# Altium PCB PCB_remote.PcbDoc
Units mm, origin at the board's own origin, x right, y up, seen from the top; angles counter-clockwise.
Board outline 91.74 x 75.36 mm, 2 copper layers (Top Layer, Bottom Layer); 11 components, 18 nets, 119 pads, 0 vias.
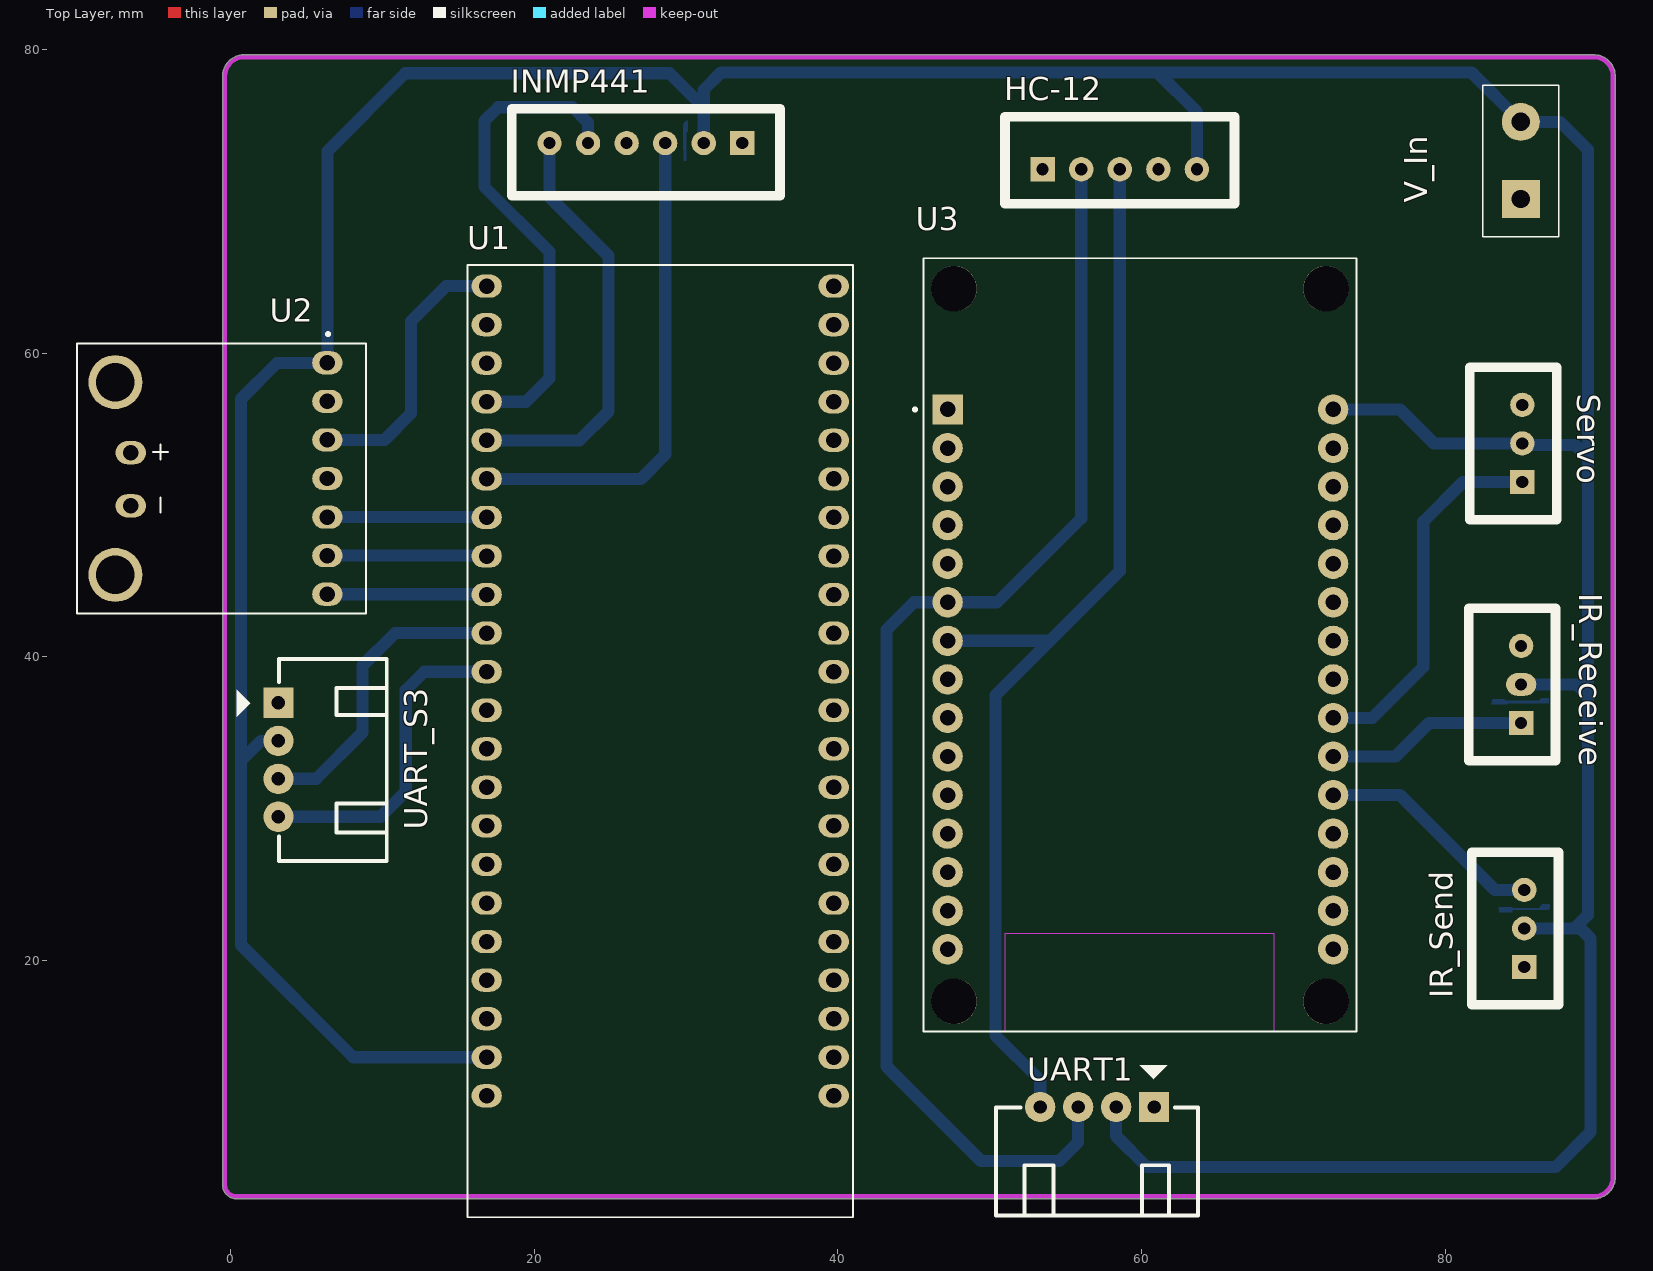
[diagram p0: Top Layer view]
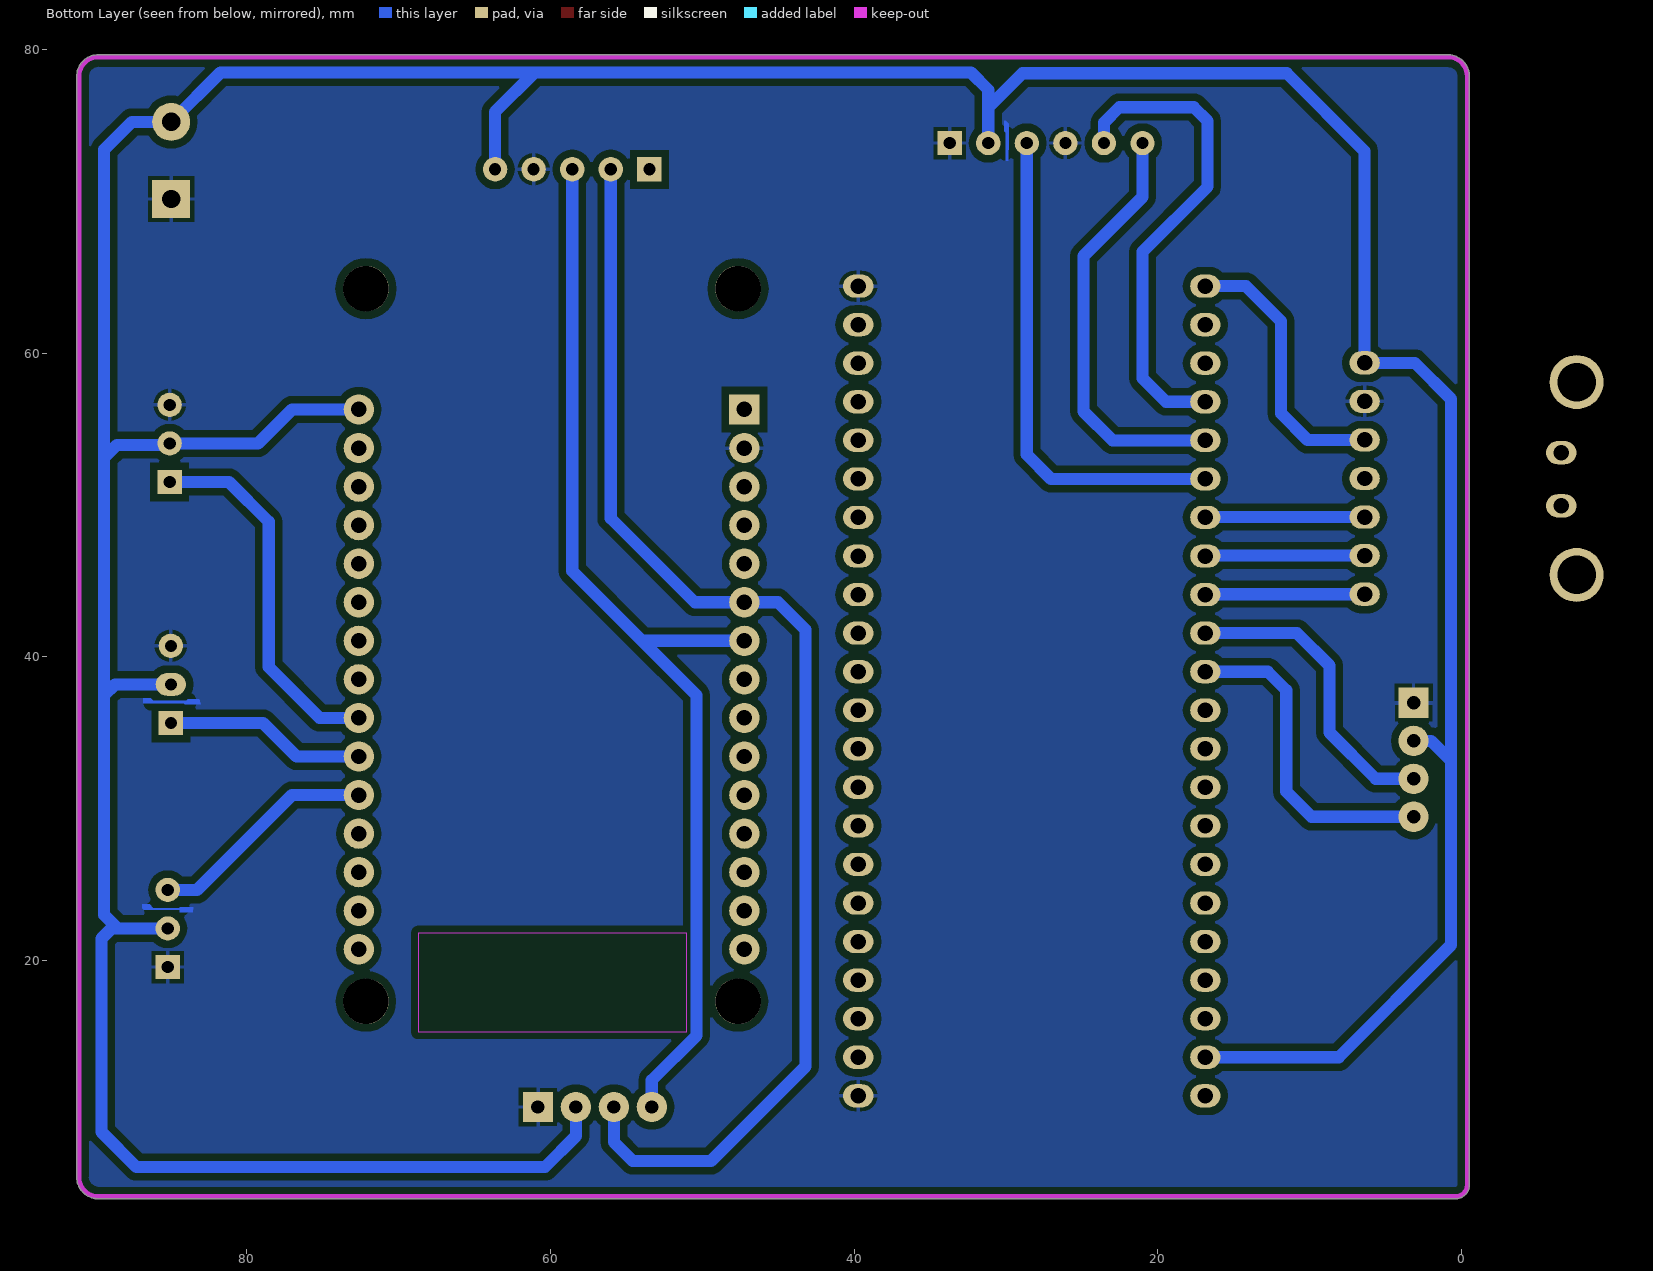
[diagram p1: Bottom Layer view, seen from below]
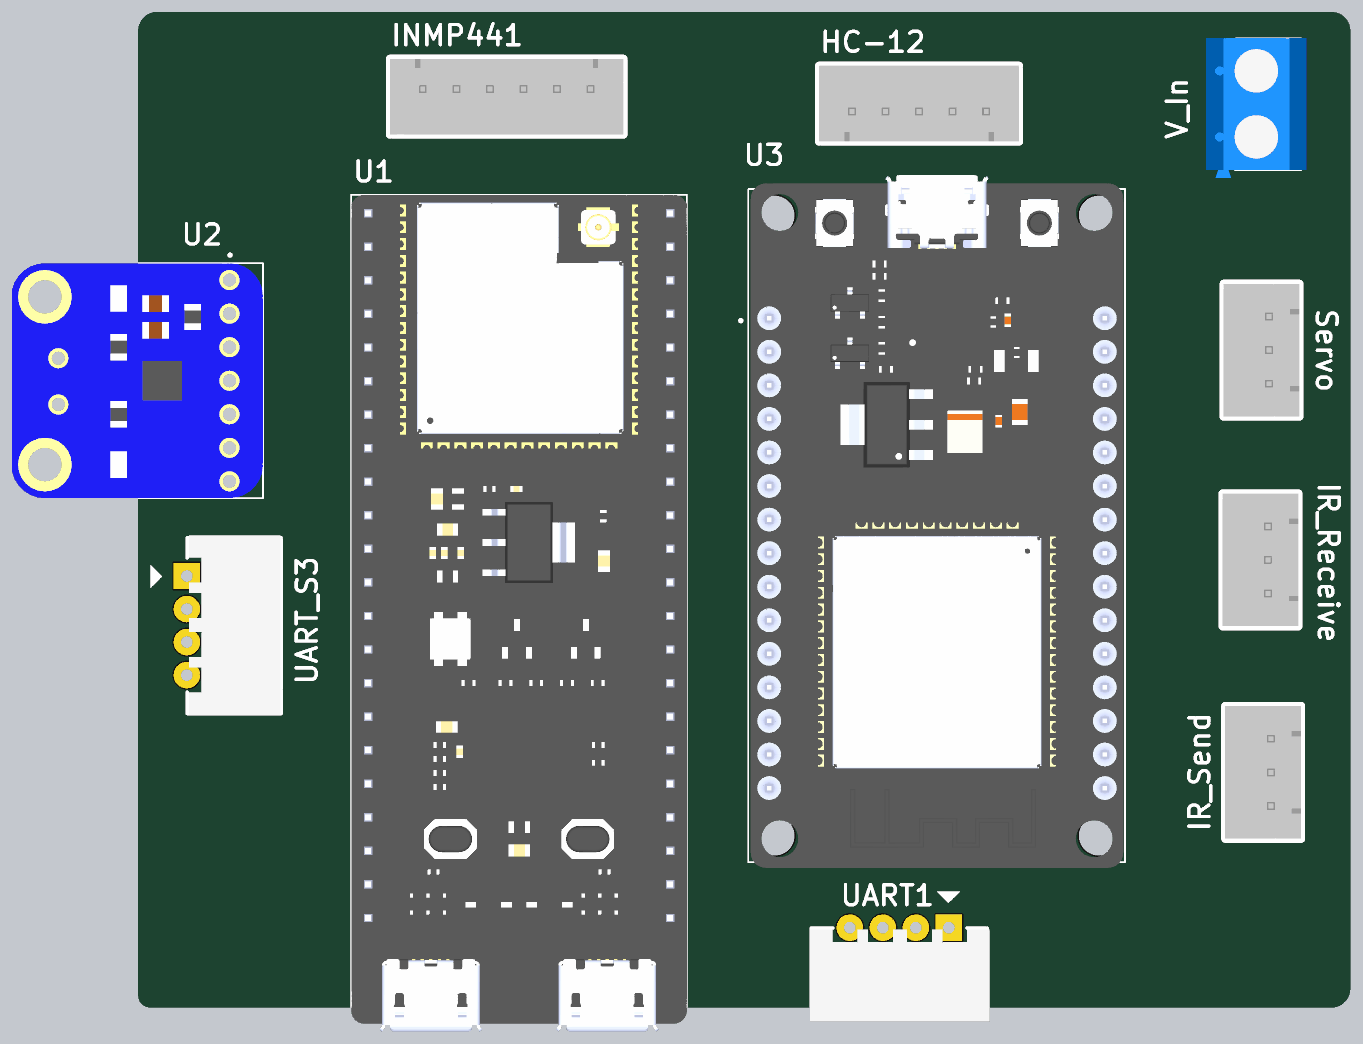
[diagram p2: 3D render of the assembled board from above, using the file's embedded part models]

## Layer stack, top to bottom
Top Solder: solder mask 0.0102, Solder Resist, Dk 3.5
Top Layer: signal copper 0.0356
Dielectric 1: dielectric 0.32, FR-4, Dk 4.8
Bottom Layer: signal copper 0.0356
Bottom Solder: solder mask 0.0102, Solder Resist, Dk 3.5

## Board outline
-0.531,5.207 ccw(c0.381,5.207) 0.381,4.295 89.941,4.295 ccw(c89.941,4.445) 90.012,4.312 ccw(c89.789,5.715) 91.209,5.715 91.209,78.308 ccw(c91.059,78.308) 91.205,78.345 ccw(c89.789,78.232) 89.789,79.652 0.762,79.652 ccw(c0.762,79.502) 0.702,79.64 ccw(c0.889,78.232) -0.531,78.232

## Design rules (kind name [scope] priority, off if disabled: settings)
Clearance [All] p1: gap=0.5 ignorepadtopadclearanceinfootprint=FALSE
PolygonConnect [All] p1: connectstyle=Relief reliefconductorwidth=0.254 reliefentries=4 polygonreliefangle="90 Angle" airgapwidth=0.254
RoomDefinition Sch_remote [InComponentClass('Sch_remote')] p1: confinementstyle=ConfineIn formatcopy=TRUE lockcomponents=FALSE outline -78.105,-45.593 -27.305,-45.593 -27.305,-20.193 -78.105,-20.193
RoutingVias [All] p1: holewidth=0.711 width=1.27 viastyle="Through Hole" minholewidth=0.711 minwidth=1.27 maxholewidth=0.711 maxwidth=1.27
SolderMaskExpansion [All] p1: expansion=0.102
Width [All] p1: maxlimit=0.254 minlimit=0.254 preferedwidth=0.254
30 further rules are at their usual default settings.

## Components (designator, comment, footprint, x,y, rotation, side; value= is the part's Value field where it differs from the comment)
HC-12 "HC-12" XH2.54M-5 53.492,72.111 r0 top
INMP441 "INMP441" XH2.54M-6 33.706,73.838 r180 top
IR_Receive "IR_Receive" XH2.54M-3#1 85.014,35.636 r90 top
IR_Send "IR_Send" XH2.54M-3#2 85.217,19.558 r90 top
Servo "Servo" XH2.54M-3#2 85.09,51.511 r90 top
U1 "ESP32-S3-DEVKITC" ESP32_S3_DEV_KIT 28.296,34.444 r0 top
U2 "MAX98357A" MAX98357 -0.61,51.74 r90 top
U3 "ESP32_30Pin_DevKit" MODULE_ESP32_DEVKIT_V1 59.93,40.772 r0 top
UART1 "UART1" "Header 4P DC 2.54" 60.804,10.312 r270 top
UART_S3 "UART_S3" "Header 4P DC 2.54" 3.175,36.932 r0 top
V_In "V_In" header_2_power 84.988,70.155 r90 top

## Footprints (in the part's own frame and the unit in brackets; to place one, negate y for a bottom-side part, rotate by r counter-clockwise, add the part's x,y. Pads: shape width x height; smd on the part's side, far side on the other; paste and mask are expansions set on the pad)
ESP32_S3_DEV_KIT [mm]
  oval 2x1.53 hole 1.02 mask+0.102: J1_1(-11.43,29.97) J1_2(-11.43,27.43) J1_3(-11.43,24.89) J1_4(-11.43,22.35) J1_5(-11.43,19.81) J1_6(-11.43,17.27) J1_7(-11.43,14.73) J1_8(-11.43,12.19) J1_9(-11.43,9.65) J1_10(-11.43,7.11) J1_11(-11.43,4.57) J1_12(-11.43,2.03) J1_13(-11.43,-0.51) J1_14(-11.43,-3.05) J1_15(-11.43,-5.59) J1_16(-11.43,-8.13) J1_17(-11.43,-10.67) J1_18(-11.43,-13.21) J1_19(-11.43,-15.75) J1_20(-11.43,-18.29) J1_21(-11.43,-20.83) J1_22(-11.43,-23.37) J3_1(11.43,29.97) J3_2(11.43,27.43) J3_3(11.43,24.89) J3_4(11.43,22.35) J3_5(11.43,19.81) J3_6(11.43,17.27) J3_7(11.43,14.73) J3_8(11.43,12.19) J3_9(11.43,9.65) J3_10(11.43,7.11) J3_11(11.43,4.57) J3_12(11.43,2.03) J3_13(11.43,-0.51) J3_14(11.43,-3.05) J3_15(11.43,-5.59) J3_16(11.43,-8.13) J3_17(11.43,-10.67) J3_18(11.43,-13.21) J3_19(11.43,-15.75) J3_20(11.43,-18.29) J3_21(11.43,-20.83) J3_22(11.43,-23.37)
  silkscreen extent -12.7,-31.37 12.7,31.37, body extent -12.7,-31.96 12.7,31.37, height 7.49
"Header 4P DC 2.54" [mil]
  rect 78.74x78.74 hole 35: 1(-1,1)
  round 78.74 hole 35: 2(-1,-97.43) 3(-1,-195.85) 4(-1,-294.28)
  silkscreen extent -110,-409 280,115, body extent 5,-413 278,123, height 290
header_2_power [mm]
  rect 2.5x2.5 hole 1.2 unplated mask+0.102: 1(0,0)
  round 2.5 hole 1.2 unplated mask+0.102: 2(5.08,0)
  silkscreen extent -2.5,-2.5 7.5,2.5, body extent -3.06,-2.91 7.54,4.69, height 10
MAX98357 [mm]
  oval 1.53x2 hole 1.02: 1(7.62,-6.985) 2(5.08,-6.985) 3(2.54,-6.985) 4(0,-6.985) 5(-2.54,-6.985) 6(-5.08,-6.985) 7(-7.62,-6.985) X1_1(-1.8,5.969) X1_2(1.7,5.969)
  round 3.556 hole 2.54: MH1(-6.35,6.985) MH2(6.35,6.985)
  silkscreen extent -8.89,-9.53 9.61,9.53, body extent -8.89,-9.53 8.89,9.53, height 3
MODULE_ESP32_DEVKIT_V1 [mm]
  rect 2x2 / inner round 2 / far side rect 2x2 hole 1.02: 1(-12.7,15.515)
  round 2 hole 1.02: 2(-12.7,12.975) 3(-12.7,10.435) 4(-12.7,7.895) 5(-12.7,5.355) 6(-12.7,2.815) 7(-12.7,0.275) 8(-12.7,-2.265) 9(-12.7,-4.805) 10(-12.7,-7.345) 11(-12.7,-9.885) 12(-12.7,-12.425) 13(-12.7,-14.965) 14(-12.7,-17.505) 15(-12.7,-20.045) 16(12.7,-20.045) 17(12.7,-17.505) 18(12.7,-14.965) 19(12.7,-12.425) 20(12.7,-9.885) 21(12.7,-7.345) 22(12.7,-4.805) 23(12.7,-2.265) 24(12.7,0.275) 25(12.7,2.815) 26(12.7,5.355) 27(12.7,7.895) 28(12.7,10.435) 29(12.7,12.975) 30(12.7,15.515)
  round 3 hole 3 unplated: ""(-12.28,-23.475) ""(-12.28,23.475) ""(12.23,-23.475) ""(12.23,23.475)
  Keep-Out Layer region: 8.78,-25.475 -8.91,-25.475 -8.91,-18.985 8.78,-18.985
  Keep-Out Layer region: 8.78,-25.475 -8.91,-25.475 -8.91,-18.985 8.78,-18.985
  silkscreen extent -14.95,-25.48 14.23,25.48, body extent -14.1,-25.9 14.1,26.55, height 7.05
XH2.54M-3#1 [mm]
  rect 1.6x1.6 hole 0.8: 1(0,0)
  oval 1.5x2 hole 0.8: 2(2.54,0)
  round 1.6 hole 0.8: 3(5.08,0)
  silkscreen extent -2.48,-2.26 7.56,3.46, body extent -2.48,-2.26 7.56,3.48, height 6.91
XH2.54M-3#2 [mm]
  rect 1.6x1.6 hole 0.8: 1(0,0)
  round 1.6 hole 0.8: 2(2.54,0) 3(5.08,0)
  silkscreen extent -2.48,-2.26 7.56,3.46, body extent -2.48,-2.26 7.56,3.48, height 6.91
XH2.54M-5 [mm]
  rect 1.6x1.6 hole 0.8: 1(0,0)
  round 1.6 hole 0.8: 2(2.54,0) 3(5.08,0) 4(7.62,0) 5(10.16,0)
  silkscreen extent -2.48,-2.26 12.64,3.46, body extent -2.48,-2.26 12.64,3.48, height 6.91
XH2.54M-6 [mm]
  rect 1.6x1.6 hole 0.8: 1(0,0)
  round 1.6 hole 0.8: 2(2.54,0) 3(5.08,0) 4(7.62,0) 5(10.16,0) 6(12.7,0)
  silkscreen extent -2.48,-2.26 15.18,3.46, body extent -2.48,-2.26 15.18,3.48, height 6.91

## Part data
HC-12: library part "Header 5P 2.54 Duc Thang", "C?m", Chung_Loai=C?m, Don_Vi=Con, Ma_Hang=MH001298, Ten_Linh_Kien="Header 5P XH2.54-5P Ð?c Th?ng"
INMP441: library part "Header 6P 2.54 Duc Thang", "C?m", Chung_Loai=C?m, Don_Vi=Con, Ma_Hang=MH001972, Ten_Linh_Kien="Header 6P XH2.54-6P Ð?c Th?ng"
IR_Receive IR_Send Servo: library part "Header 3P 2.54 Duc Thang", "C?m", Chung_Loai=C?m, Don_Vi=Con, Ma_Hang=MH001292, Ten_Linh_Kien="Header 3P XH2.54-3P Ð?c Th?ng"
U1: "The ESP32-S3-DEVKITC-1U-N8R8 from Espressif Systems is an evaluation board designed for wireless communication applications. It features a 32-bit Xtensa dual-core processor running at 240MHz, providing strong processing power for complex tasks. The board", Package=None, Check_prices=https://www.snapeda.com/parts/ESP32-S3-DEVKITC-1U-N8R8/Espressif+Systems/view-part/?ref=eda, MF="Espressif Systems", MP=ESP32-S3-DEVKITC-1U-N8R8, SnapEDA_Link=https://www.snapeda.com/parts/ESP32-S3-DEVKITC-1U-N8R8/Espressif+Systems/view-part/?ref=snap
U2: "MAX98357A - 1-Channel (Mono) Output Class D Audio Amplifier Evaluation Board", Package=Package, Check_prices=https://www.snapeda.com/parts/3006/Adafruit+Industries/view-part/?ref=eda, MF=Adafruit, MP=3006, SnapEDA_Link=https://www.snapeda.com/parts/3006/Adafruit+Industries/view-part/?ref=snap
U3: "Dual core, Wi-Fi: 2.4 GHz up to 150 Mbits/s,BLE (Bluetooth Low Energy) and legacy Bluetooth, 32 bits, Up to 240 MHz", Package=None, Check_prices=https://www.snapeda.com/parts/ESP32-DEVKIT-V1/Do+it/view-part/?ref=eda, MF="Do it", MP=ESP32-DEVKIT-V1, SnapEDA_Link=https://www.snapeda.com/parts/ESP32-DEVKIT-V1/Do+it/view-part/?ref=snap
UART1 UART_S3: library part "Header 4P 2.54 Duc Cong", "C?m", Chung_Loai=C?m, Don_Vi=Con, Ma_Hang=MH001310, Ten_Linh_Kien="Header 4P XH2.54-4P Ð?c Cong"
V_In: library part Header_2pin

## Nets (pads, with @x,y where several pads share a name; then routed paths per layer and width w, separated by ;. In a path a pad name is that pad's centre, name@x,y a point inside that pad or via, vN(x,y) a via of type N, cw(c..) or ccw(c..) an arc to the next point about the centre after c; other vN are vias at no path point)
BCLK: U1.J1_8 U2.6 | length 10.5
  Bottom Layer w0.8: U2.6 16.84,46.66 U1.J1_8
DIN: U1.J1_7 U2.5 | length 10.5
  Bottom Layer w0.8: U2.5 16.84,49.2 U1.J1_7
GAIN: U2.4
GND: HC-12.4 INMP441.1 INMP441.4 IR_Receive.3 IR_Send.1 Servo.3 U1.J3_1 U1.J3_22 U2.2 U3.2 UART1.1 UART_S3.1 V_In.1 | length 0
  Bottom Layer w0.254: 83.922,37.033 83.924,37.033
IN: IR_Receive.1 U3.21 | length 13.3
  Bottom Layer w0.8: U3.21 76.734,33.427 78.943,35.636 IR_Receive.1
LRC: U1.J1_9 U2.7 | length 10.5
  Bottom Layer w0.8: U2.7 16.84,44.12 U1.J1_9
NetU1_J1_1: U1.J1_1 U2.3 | length 18.2
  Bottom Layer w0.8: U2.3 10.135,54.28 11.887,56.032 11.887,62.103 14.199,64.414 U1.J1_1
NetU1_J1_10: U1.J1_10 UART_S3.3 | length 20.3
  Bottom Layer w0.8: UART_S3.3 5.643,31.957 8.687,35.001 8.687,39.421 10.82,41.554 U1.J1_10
NetU1_J1_11: U1.J1_11 UART_S3.4 | length 21.6
  Bottom Layer w0.8: UART_S3.4 9.874,29.457 11.532,31.115 11.532,37.795 12.751,39.014 U1.J1_11
OUT: IR_Send.3 U3.20 | length 15.2
  Bottom Layer w0.8: U3.20 77.037,30.887 83.287,24.638 IR_Send.3
RX2: HC-12.2 U3.6 UART1.3 | length 85.7
  Bottom Layer w0.8: UART1.3 55.829,8.026 54.585,6.782 49.428,6.782 43.205,13.005 43.205,41.783 45.01,43.587 U3.6 50.496,43.587 56.032,49.124 HC-12.2
SCK: INMP441.6 U1.J1_5 | length 28.1
  Bottom Layer w0.8: U1.J1_5 22.987,54.254 24.892,56.159 24.892,66.396 21.006,70.282 INMP441.6
SD: INMP441.3 U1.J1_6 | length 32.9
  Bottom Layer w0.8: U1.J1_6 27.026,51.714 28.626,53.315 INMP441.3
SET: HC-12.1
SIG: Servo.1 U3.22 | length 24.5
  Bottom Layer w0.8: U3.22 75.21,35.967 78.562,39.319 78.562,48.895 81.178,51.511 Servo.1
TX2: HC-12.3 U3.7 UART1.4 | length 73.1
  Bottom Layer w0.8: U3.7 53.976,41.047 ; UART1.4 53.329,12.102 50.393,15.038 50.393,37.465 53.976,41.047 ; HC-12.3 58.572,45.644 53.976,41.047
VCC: HC-12.5 INMP441.2 IR_Receive.2 IR_Send.2 Servo.2 U1.J1_21 U2.1 U3.30 UART1.2 UART_S3.2 V_In.2 | length 305.3
  Bottom Layer w0.8: UART_S3.2 1.996,34.457 0.686,33.147 ; U1.J1_21 8.077,13.614 0.686,21.006 0.686,33.147 ; INMP441.2 31.166,76.175 ; UART1.2 58.329,8.422 60.376,6.375 87.274,6.375 89.586,8.687 89.586,21.438 88.925,22.098 88.519,22.098 ; HC-12.5 63.652,75.895 61.062,78.486 ; U3.30 77.037,56.287 79.273,54.051 Servo.2 85.192,53.95 88.57,53.95 89.408,53.111 ; IR_Receive.2 88.697,38.176 89.408,37.465 ; IR_Send.2 88.519,22.098 ; 0.686,33.147 0.686,56.972 3.073,59.36 U2.1 6.375,73.304 11.506,78.435 28.905,78.435 31.166,76.175 ; 31.166,76.175 31.166,77.343 32.309,78.486 61.062,78.486 ; 61.062,78.486 81.737,78.486 V_In.2 87.579,75.235 89.408,73.406 89.408,53.111 ; 88.519,22.098 89.408,22.987 89.408,37.465 ; 89.408,37.465 89.408,53.111
WS: INMP441.5 U1.J1_4 | length 32.5
  Bottom Layer w0.8: U1.J1_4 19.456,56.794 21.006,58.344 21.006,66.675 16.713,70.968 16.713,75.286 17.628,76.2 22.53,76.2 23.546,75.184 INMP441.5
pads on no net: U1.J1_2 U1.J1_3 U1.J1_12 U1.J1_13 U1.J1_14 U1.J1_15 U1.J1_16 U1.J1_17 U1.J1_18 U1.J1_19 U1.J1_20 U1.J1_22 U1.J3_2 U1.J3_3 U1.J3_4 U1.J3_5 U1.J3_6 U1.J3_7 U1.J3_8 U1.J3_9 U1.J3_10 U1.J3_11 U1.J3_12 U1.J3_13 U1.J3_14 U1.J3_15 U1.J3_16 U1.J3_17 U1.J3_18 U1.J3_19 U1.J3_20 U1.J3_21 U2.MH1 U2.MH2 U2.X1_1 U2.X1_2 U3. U3.1 U3.3 U3.4 U3.5 U3.8 U3.9 U3.10 U3.11 U3.12 U3.13 U3.14 U3.15 U3.16 U3.17 U3.18 U3.19 U3.23 U3.24 U3.25 U3.26 U3.27 U3.28 U3.29

## Polygon pours and split planes (outlines as drawn)
GND on Bottom Layer "Top Layer-No Net 1" (solid, pour order 12): 90.094,79.502 91.034,78.562 91.034,5.436 90.043,4.445 0.381,4.445 -0.254,5.08 -0.559,5.08 -0.559,78.537 0.406,79.502

## Keep-outs
Keep-Out Layer:
  lines w0.3: 0.762,79.502 2.921,79.502 ; 3.937,4.445 87.757,4.445 ; 4.826,4.445 0.381,4.445 cw(c0.381,5.207) -0.381,5.207 -0.381,78.232 cw(c0.889,78.232) 0.889,79.502 87.122,79.502 ; 86.741,79.502 89.789,79.502 cw(c89.789,78.232) 91.059,78.232 ; 87.528,4.445 89.941,4.445 ; 89.789,4.445 ccw(c89.789,5.715) 91.059,5.715 91.059,5.994 91.059,78.308

## Other copper
Bottom Layer:
  region net GND: 29.827,74.335 29.827,75.115 30.023,75.311 30.124,75.311 30.124,74.61 29.835,74.321 29.835,72.672 30.03,72.672 30.03,73.182
  region net GND: 86.157,23.444 86.411,23.698 86.893,23.698 86.893,23.417 86.794,23.317 86.284,23.317
  region net GND: 83.526,23.506 84.419,23.506 84.419,23.339 84.419,23.182 83.587,23.182
  region net GND: 86.166,37.084 86.35,37.268 86.828,37.268 86.828,36.94 86.824,36.936 86.314,36.936
  region net GND: 83.058,36.881 84.104,36.881 84.159,36.936 83.91,37.186 83.134,37.186
  region net GND: 29.827,74.335 29.827,73.385 30.03,73.182 30.03,74.574
  region net GND: 84.226,23.317 84.645,23.317 86.284,23.317 86.157,23.444 84.277,23.444
  region net GND: 84.159,36.936 86.314,36.936 86.166,37.084 84.011,37.084

## Text inside footprints (layer, text, board x,y; h text height)
U1: Mechanical 13 "J1" at 18.296,63.944 h1.27; Mechanical 13 "J3" at 36.546,63.944 h1.27